# Altium PCB paw7.PcbDoc
Units mm, origin at the board's own origin, x right, y up, seen from the top; angles counter-clockwise.
Board outline 50 x 50 mm, 2 copper layers (Top Layer, Bottom Layer); 39 components, 67 nets, 199 pads, 66 vias.
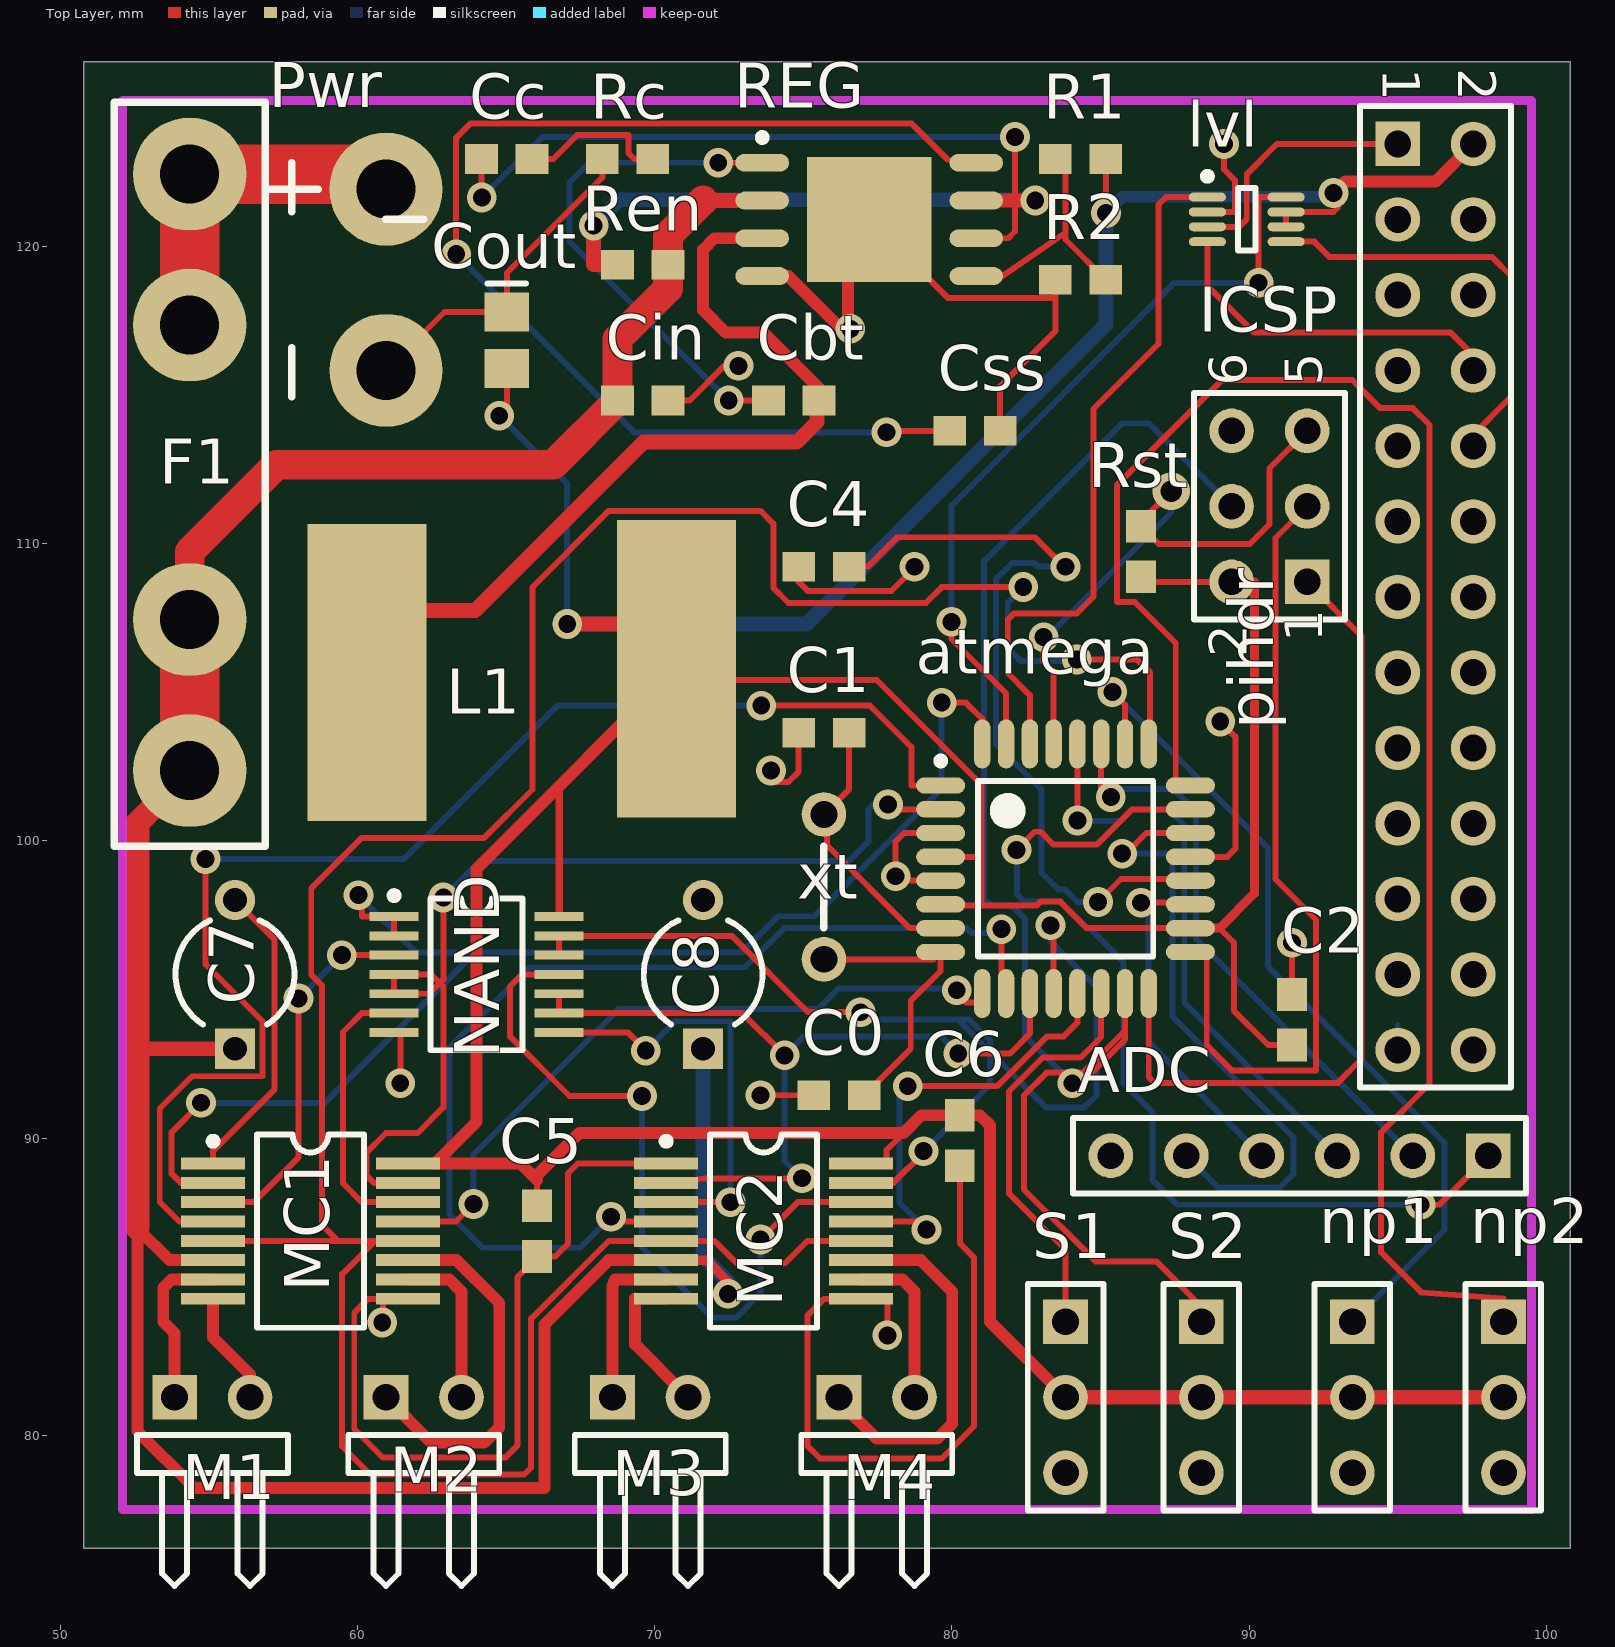
[diagram p0: Top Layer view]
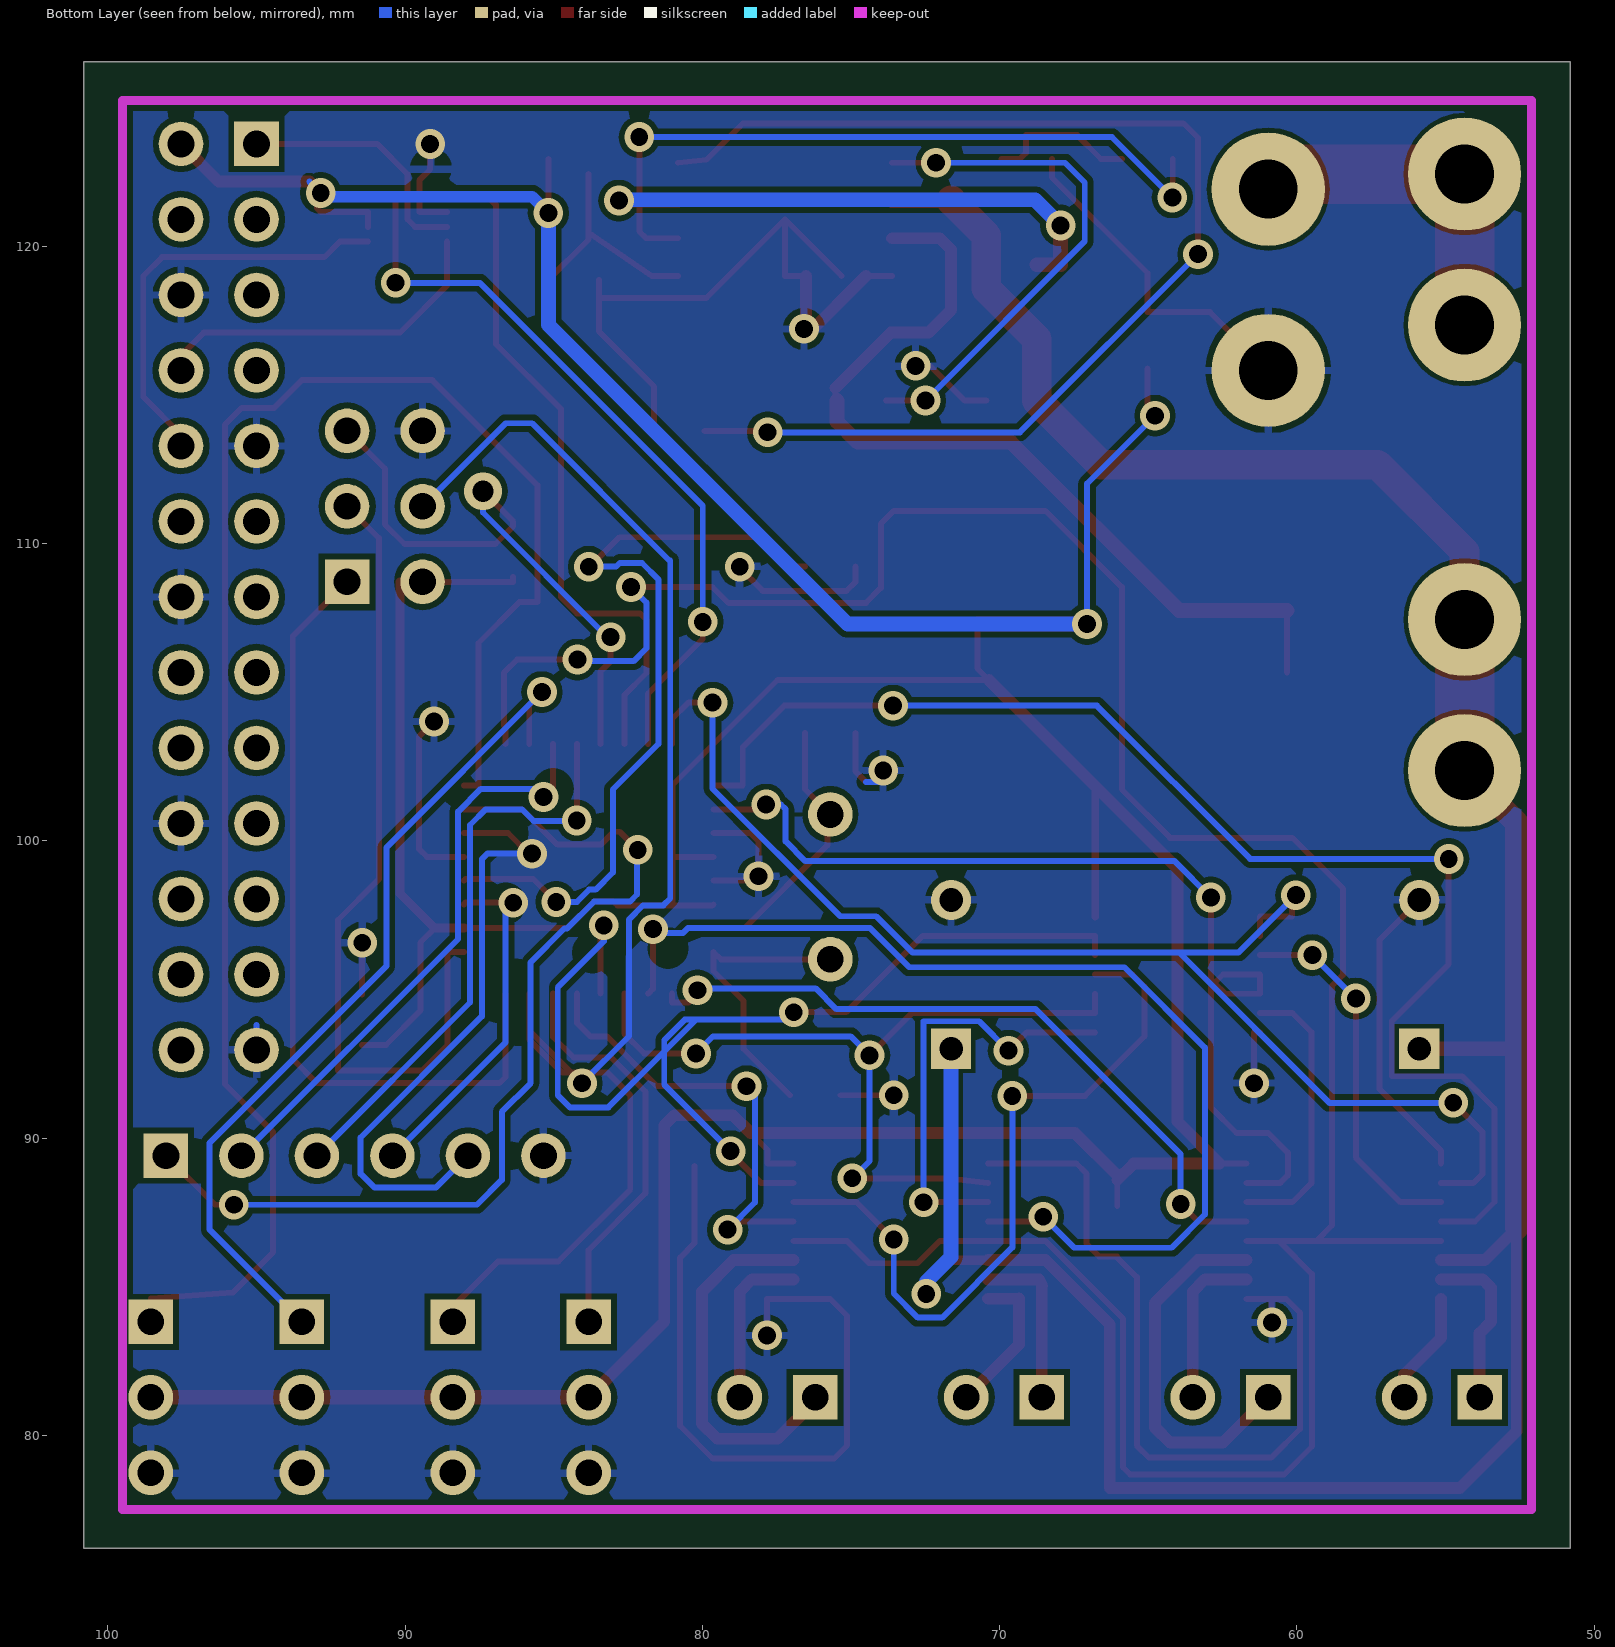
[diagram p1: Bottom Layer view, seen from below]

## Layer stack, top to bottom
Top Layer: signal copper 0.0356
Dielectric: dielectric 0.32, FR-4, Dk 4.8
Bottom Layer: signal copper 0.0356

## Board outline
50.8,76.2 100.8,76.2 100.8,126.2 50.8,126.2

## Design rules (kind name [scope] priority, off if disabled: settings)
Clearance Clearance_1 [InNetClass('12V')] p1: gap=0.15
Clearance [All] p2: gap=0.2
PolygonConnect [All] p1: connectstyle=Relief reliefconductorwidth=0.254 reliefentries=4 polygonreliefangle="90 Angle"
RoutingVias [All] p1: holewidth=0.6 width=1 viastyle="Through Hole" minholewidth=0.711 minwidth=1.27 maxholewidth=0.711 maxwidth=1.27
SMDNeckDown [All] p1: percent=80.000
SilkscreenOverComponentPads [All] p1: minsilkscreentomaskgap=0.254
SolderMaskExpansion [All] p1: expansion=0.102
TestPointUsage [All] p1: valid=0 allowmultiple=FALSE
Testpoint [All] p1: side=15 testpointundercomponent=TRUE minsize=1.016 maxsize=2.54 preferedsize=1.524 minholesize=0 maxholesize=1.016 preferedholesize=0.813 testpointgrid=0.025 style=1023 order=0123456789
Width Width_3 [InNet('NetREG_7')] p1: maxlimit=1 minlimit=0.254 preferedwidth=0.5
Width Width_2 [InNetClass('12V')] p2: maxlimit=1 minlimit=0.254 preferedwidth=0.5
Width Width_1 [InNetClass('Motor')] p3: maxlimit=0.4 minlimit=0.254 preferedwidth=0.4
Width [All] p4: maxlimit=0.2 minlimit=0.2 preferedwidth=0.2
23 further rules are at their usual default settings.

## Classes and differential pairs
net class Motor: NetM1_1 NetM1_2 NetM2_1 NetM2_2 NetM3_1 NetM3_2 NetM4_1 NetM4_2
net class 12V: NetF1_1 VBATT
component class U_PwrSupply: Cbt Cc Cin Cout Css L1 R1 R2 Rc REG Ren
component class U_MotorDriverToshiba: C5 C6 C7 C8 M1 M2 M3 M4 MC1 MC2 NAND
component class RpiPaw1_Sch: ADC atmega C0 C1 C2 C4 F1 ICSP lvl np1 np2 pihdr Pwr Rst S1 S2 xt

## Components (designator, comment, footprint, x,y, rotation, side; value= is the part's Value field where it differs from the comment)
ADC "A0A4A5A6A7" HDR1X6 98.044,89.408 r180 top
atmega "ATmega328P-AUR" TQFP32_N 83.82,99.06 r0 top
C0 "20pf 0603" J1-0603 76.2,91.44 r0 top
C1 "10pf 0603" J1-0603 75.692,103.632 r0 top
C2 "0.1uF 0603" J1-0603 91.44,93.98 r270 top
C4 "0.1uF 0603" J1-0603 75.692,109.22 r0 top
C5 "" J1-0603 66.04,86.868 r90 top
C6 "" J1-0603 80.264,89.916 r90 top
C7 "" CAPR5-4X5 55.88,95.504 r90 top
C8 "" CAPR5-4X5 71.628,95.504 r90 top
Cbt "" J1-0603 74.676,114.808 r180 top
Cc "" J1-0603 65.024,122.936 r0 top
Cin "" J1-0603 69.596,114.808 r180 top
Cout "" C0805 65.024,116.84 r270 top
Css "" J1-0603 80.772,113.792 r180 top
F1 "Fuse 20mm" FusePad1 54.356,122.428 r270 top
ICSP "Header 3X2" HDR2X3 91.948,108.712 r90 top
L1 "" Inductor_Paw 65.532,105.664 r0 top
lvl "TXB0102" TSSOP50P310X90-8N 89.916,120.904 r0 top
M1 "Header 2H" HDR1X2H 53.848,81.28 r0 top
M2 "Header 2H" HDR1X2H 60.96,81.28 r0 top
M3 "Header 2H" HDR1X2H 68.58,81.28 r0 top
M4 "Header 2H" HDR1X2H 76.2,81.28 r0 top
MC1 "TB6552FNG" SSOP16 58.42,86.868 r270 top
MC2 "TB6552FNG" SSOP16 73.66,86.868 r270 top
NAND "MM74HC132MTC" TSSOP14 64.008,95.504 r270 top
np1 "neoPix2" HDR1X3 93.472,83.82 r270 top
np2 "neoPix1" HDR1X3 98.552,83.82 r270 top
pihdr "Header 13X2" HDR2X13 94.996,123.444 r270 top
Pwr "Header 2" PwrPlug1 60.96,115.824 r90 top
R1 "" J1-0603 84.328,122.936 r0 top
R2 "" J1-0603 84.328,118.872 r0 top
Rc "" J1-0603 69.088,122.936 r0 top
REG "RT8250GSP" SOP-8-C_N 77.216,120.904 r0 top
Ren "" J1-0603 69.596,119.38 r0 top
Rst "10K 0603" J1-0603 86.36,109.728 r270 top
S1 "Servo1" HDR1X3 83.82,83.82 r270 top
S2 "Servo2" HDR1X3 88.392,83.82 r270 top
xt "16MHz" "Axial 0.2" 75.692,96.012 r90 top

## Footprints (in the part's own frame and the unit in brackets; to place one, negate y for a bottom-side part, rotate by r counter-clockwise, add the part's x,y. Pads: shape width x height; smd on the part's side, far side on the other; paste and mask are expansions set on the pad)
"Axial 0.2" [mm]
  round 1.5 hole 0.9: 1(0,0) 2(4.877,0)
  silkscreen extent 1.07,0 3.81,0
C0805 [mm] "Chip Capacitor; Body 2.0 x 1.2 mm (LxW typ)"
  rect 1.3x1.5 smd: 1(-0.95,0) 2(0.95,0)
  silkscreen extent -1.9,-0.65 -1.9,0.65
CAPR5-4X5 [mm] "Capacitor; 2 Leads"
  rect 1.35x1.35 hole 0.8: 1(-2.5,0)
  round 1.35 hole 0.8: 2(2.5,0)
  silkscreen extent -1.69,-2 1.82,2
FusePad1 [mil]
  round 150 hole 78: 1(0,0) 1(200,0) 2(590,0) 2(790,0)
  silkscreen extent -95,-100 890,100
HDR1X2H [mm] "Connector; Header; 2 Position; Right Angle"
  rect 1.5x1.5 hole 0.9: 1(0,0)
  round 1.5 hole 0.9: 2(2.54,0)
  silkscreen extent -1.27,-6.35 3.81,-1.27
HDR1X3 [mm] "Connector; Header; 3 Position"
  rect 1.5x1.5 hole 0.9: 1(0,0)
  round 1.5 hole 0.9: 2(2.54,0) 3(5.08,0)
  silkscreen extent -1.27,-1.27 6.35,1.27
HDR1X6 [mm] "Connector; Header; 6 Position"
  rect 1.5x1.5 hole 0.9: 1(0,0)
  round 1.5 hole 0.9: 2(2.54,0) 3(5.08,0) 4(7.62,0) 5(10.16,0) 6(12.7,0)
  silkscreen extent -1.27,-1.27 13.97,1.27
HDR2X3 [mm] "Connector; Header; 3x2 Position"
  rect 1.5x1.5 hole 0.9: 1(0,0)
  round 1.5 hole 0.9: 2(0,2.54) 3(2.54,0) 4(2.54,2.54) 5(5.08,0) 6(5.08,2.54)
  silkscreen extent -1.27,-1.27 6.35,3.81
HDR2X13 [mm] "Connector; Header; 13x2 Position"
  rect 1.5x1.5 hole 0.9: 1(0,0)
  round 1.5 hole 0.9: 2(0,2.54) 3(2.54,0) 4(2.54,2.54) 5(5.08,0) 6(5.08,2.54) 7(7.62,0) 8(7.62,2.54) 9(10.16,0) 10(10.16,2.54) 11(12.7,0) 12(12.7,2.54) 13(15.24,0) 14(15.24,2.54) 15(17.78,0) 16(17.78,2.54) 17(20.32,0) 18(20.32,2.54) 19(22.86,0) 20(22.86,2.54) 21(25.4,0) 22(25.4,2.54) 23(27.94,0) 24(27.94,2.54) 25(30.48,0) 26(30.48,2.54)
  silkscreen extent -1.27,-1.27 31.75,3.81
Inductor_Paw [mm]
  rect 4x10 smd: 1(-5.207,0) 2(5.207,0.127)
  body extent -4.77,-4.36 4.19,4.62, height 4
J1-0603 [mm] "Chip Resistor; Body 1.6 x 0.8 mm (LxW typ)"
  rect 1.1x1 smd: 1(-0.85,0) 2(0.85,0)
PwrPlug1 [mil]
  round 150 hole 78: 1(0,0) 2(240,0)
  silkscreen extent -35,-50 275,160
SOP-8-C_N [mm] "8-Pin Small Outline Package 1.27 mm Pitch, IPC Medium Density"
  oval 1.8x0.6 smd: 1(-3.6,1.905) 2(-3.6,0.635) 3(-3.6,-0.635) 4(-3.6,-1.905) 5(3.6,-1.905) 6(3.6,-0.635) 7(3.6,0.635) 8(3.6,1.905)
  rect 4.2x4.2 smd: 9(0,0)
  silkscreen extent -3.72,2.63 -3.47,2.88, body extent -2.11,-2.28 2.11,2.28, height 1.45
SSOP16 [mm] "SSOP; 16 Leads; Body Width 5.3 mm; Pitch 0.65 mm"
  rect 0.4x2.15 smd: 1(-2.275,-3.275) 2(-1.625,-3.275) 3(-0.975,-3.275) 4(-0.325,-3.275) 5(0.325,-3.275) 6(0.975,-3.275) 7(1.625,-3.275) 8(2.275,-3.275) 9(2.275,3.275) 10(1.625,3.275) 11(0.975,3.275) 12(0.325,3.275) 13(-0.325,3.275) 14(-0.975,3.275) 15(-1.625,3.275) 16(-2.275,3.275)
  silkscreen extent -3.25,-3.4 3.25,1.8
TQFP32_N [mm] "32-Pin Plastic Thin Quad Flat Pack (TFQP32), IPC Medium Density"
  oval 1.65x0.55 smd: 1(-4.2,2.8) 2(-4.2,2) 3(-4.2,1.2) 4(-4.2,0.4) 5(-4.2,-0.4) 6(-4.2,-1.2) 7(-4.2,-2) 8(-4.2,-2.8) 17(4.2,-2.8) 18(4.2,-2) 19(4.2,-1.2) 20(4.2,-0.4) 21(4.2,0.4) 22(4.2,1.2) 23(4.2,2) 24(4.2,2.8)
  oval 0.55x1.65 smd: 9(-2.8,-4.2) 10(-2,-4.2) 11(-1.2,-4.2) 12(-0.4,-4.2) 13(0.4,-4.2) 14(1.2,-4.2) 15(2,-4.2) 16(2.8,-4.2) 25(2.8,4.2) 26(2,4.2) 27(1.2,4.2) 28(0.4,4.2) 29(-0.4,4.2) 30(-1.2,4.2) 31(-2,4.2) 32(-2.8,4.2)
  silkscreen extent -4.32,-2.95 2.95,3.75, body extent -3.5,-3.5 3.5,3.5, height 1.2
TSSOP14 [mm] "Shrink Small Outline; 14 Leads; Body Width 4.4 mm; Pitch 0.65 mm"
  rect 0.3x1.65 smd: 1(-1.95,-2.775) 2(-1.3,-2.775) 3(-0.65,-2.775) 4(0,-2.775) 5(0.65,-2.775) 6(1.3,-2.775) 7(1.95,-2.775) 8(1.95,2.775) 9(1.3,2.775) 10(0.65,2.775) 11(0,2.775) 12(-0.65,2.775) 13(-1.3,2.775) 14(-1.95,2.775)
  silkscreen extent -2.77,-2.9 2.55,1.55
TSSOP50P310X90-8N [mm] "TSSOP, 8-Leads, Body 2.1x2.4mm (max), Pitch 0.50mm, IPC Medium Density"
  oval 1.25x0.3 smd: 1(-1.325,0.75) 2(-1.325,0.25) 3(-1.325,-0.25) 4(-1.325,-0.75) 5(1.325,-0.75) 6(1.325,-0.25) 7(1.325,0.25) 8(1.325,0.75)
  silkscreen extent -1.45,-1.05 0.3,1.57, body extent -1.2,-1.05 1.2,1.05, height 0.9

## Part data
ADC: library part "Header 6", "Header, 6-Pin"
atmega: "8-bit AVR Microcontroller, 32KB Flash, 1KB EEPROM, 2KB SRAM, 32-pin TQFP, Industrial Grade (-40°C to 85°C)"
C0 C1 C2 C4: library part Cap, "Capacitor"
C5 C6 Cbt Cc Cin Cout Css: library part CAP, "Capacitor"
C7 C8: library part Cap2, "Capacitor"
F1: library part "Fuse 1", "Fuse"
ICSP: "Header, 3-Pin, Dual row"
L1: library part Inductor, "Inductor"
lvl: "3.3V Level translator"
M1 M2 M3 M4: "Header, 2-Pin, Right Angle"
MC1 MC2: "2CH 1A PMIC"
NAND: "4Ch NAND Gate"
np1 np2 S1 S2: library part "Header 3", "Header, 3-Pin"
pihdr: "Header, 13-Pin, Dual row"
Pwr: "Header, 2-Pin"
R1 R2 Rc Ren: library part Res3, "Resistor"
REG: "3A 5V Buck Regulator"
Rst: library part Res2, "Resistor"
xt: library part XTAL, "Crystal Oscillator"

## Via types
v1: diameter 1, hole 0.6, Top Layer to Bottom Layer, 65 vias
v2: diameter 1.27, hole 0.711, Top Layer to Bottom Layer, 1 vias

## Nets (pads, with @x,y where several pads share a name; then routed paths per layer and width w, separated by ;. In a path a pad name is that pad's centre, name@x,y a point inside that pad or via, vN(x,y) a via of type N, cw(c..) or ccw(c..) an arc to the next point about the centre after c; other vN are vias at no path point)
+3.3V: lvl.3 pihdr.1 | length 8.5
  Top Layer w0.2: lvl.3 89.666,120.654 89.916,120.904 89.916,122.428 90.932,123.444 pihdr.1
+5V: atmega.4 atmega.6 atmega.18 C2.2 C5.2 C6.2 Cout.2 ICSP.2 L1.2 lvl.6 lvl.7 MC1.16 MC2.16 NAND.14 np1.2 np2.2 pihdr.2 R1.2 Rst.2 S1.2 S2.2 | length 182.3
  Top Layer w0.2: MC1.16 MC1.16@62.6,89.143 ; v1@64.77,114.351 65.024,114.605 Cout.2 ; C5.2 66.04,88.595 66.04,88.748 ; L1.2@70.739,107.29 L1.2 70.358,105.41 70.739,105.41 77.47,105.41 81.001,101.879 81.001,99.46 ; MC2.16 77.8,89.143 77.8,89.598 78.373,90.17 ; atmega.6 79.652,97.828 82.854,97.828 82.981,97.955 83.643,97.955 84.538,97.06 atmega.18 ; atmega.4 81.001,99.46 ; 81.001,97.885 81.001,99.46 ; v1(85.178,121.119) R1.2 ; Rst.2 86.36,108.712 90.17,108.712 ; 89.002,97.06 89.484,96.577 89.484,94.285 90.639,93.13 C2.2 ; lvl.6 lvl.7 ; 92.198,121.154 lvl.7 ; v1@92.964,121.793 92.964,121.285 92.833,121.154 lvl.7
  Top Layer w0.254: NAND.14 66.783,101.835
  Top Layer w0.3: atmega.18 89.002,97.06 90.17,98.228 90.17,108.712 ; v1(92.837,121.793) 93.218,122.174
  Top Layer w0.4: 66.04,88.595 65.492,89.143 62.6,89.143 64.008,90.551 64.008,99.06 66.783,101.835 68.631,103.683 L1.2@70.358,105.41 ; 66.04,88.748 67.462,90.17 78.373,90.17 78.969,90.766 C6.2 80.938,90.766 81.28,90.424 81.28,90.17 81.28,83.82 S1.2 ; 93.218,122.174 96.266,122.174 pihdr.2
  Top Layer w0.5: v1(67.056,107.29) L1.2@70.739,107.29 ; S1.2 S2.2 np1.2 np2.2
  Bottom Layer w0.2: v1(64.77,114.3) 67.056,112.014 v1(67.056,107.29) ; v1@92.837,121.92 v1(92.837,121.793) 93.218,122.174
  Bottom Layer w0.4: v1(85.178,121.119) 85.725,121.666 v1@92.71,121.666
  Bottom Layer w0.5: v1(67.056,107.29) 75.108,107.29 85.178,117.36 v1(85.178,121.119)
GND: ADC.6 atmega.3 atmega.5 atmega.21 C0.1 C1.1 C2.1 C4.1 C5.1 C6.1 C7.2 C8.2 Cin.1 Cout.1 Css.1 ICSP.6 lvl.2 MC1.1 MC1.9 MC2.1 MC2.9 NAND.7 np1.3 np2.3 pihdr.6 pihdr.9 pihdr.14 pihdr.20 pihdr.25 Pwr.1 R2.1 Rc.1 REG.4 REG.9 S1.3 S2.3 | length 127.3
  Top Layer w0.2: MC1.1 55.143,89.143 55.143,89.573 57.214,91.643 57.214,96.67 C7.2 ; v1(60.833,83.795) 60.858,83.82 MC1.9@60.858,84.593 ; Pwr.1 62.926,117.79 Cout.1 65.024,119.101 68.238,122.315 Rc.1 ; NAND.7 61.443,93.554 v1(61.443,91.846) ; MC1.9 MC1.9@60.858,84.593 ; MC2.1 67.412,89.143 67.081,88.813 67.081,86.45 66.65,86.018 C5.1 66.04,85.979 65.38,85.319 65.38,79.654 64.973,79.248 60.858,79.248 59.893,80.213 59.893,84.125 60.361,84.593 MC1.9@60.858,84.593 ; Cin.1 71.171,114.808 72.339,115.976 v1(72.822,115.976) ; v1(73.558,91.44) C0.1 ; REG.4 REG.4@74.498,118.999 ; v1(73.914,102.362) 73.914,102.108 74.041,101.981 74.498,101.981 74.842,102.325 C1.1 ; C4.1 74.842,108.712 75.147,108.407 77.967,108.407 v1@78.78,109.22 ; REG.9@75.311,118.999 REG.9 ; REG.9@76.505,118.999 77.216,118.999 REG.9 ; v1(77.826,83.363) 77.826,84.593 MC2.9 75.703,84.593 75.133,84.023 75.133,79.654 75.565,79.223 79.654,79.223 80.747,80.315 80.747,85.979 80.264,86.462 C6.1 ; atmega.5 78.607,98.66 78.105,99.162 78.105,99.974 78.391,100.26 atmega.3 ; Css.1 81.622,115.289 83.478,117.145 83.478,118.262 ; R2.1 83.478,118.262 ; atmega.21 89.262,99.46 89.535,99.733 89.535,103.505 v1(89.027,104.013) ; lvl.2 89.516,121.154 89.516,122.218 89.154,122.58 v1(89.154,123.444) ; C2.1 v1(91.44,96.571) ; REG.9 79.858,118.262 83.478,118.262
  Top Layer w0.4: REG.4@74.498,118.999 76.505,116.992 REG.9@76.505,118.999
  Bottom Layer w0.2: v1(73.914,102.362) 73.914,102.108 74.041,101.981 74.498,101.981 ; v1@89.129,123.419 v1(89.154,123.444) ; pihdr.25 94.996,93.802
  other v1: 78.105,98.806 78.74,109.22 76.581,117.221
GPIO0(SDA): pihdr.3
GPIO1(SCL): pihdr.5
GPIO4: pihdr.7
GPIO7(CE1): pihdr.26
GPIO8(CE0): pihdr.24
GPIO9(MISO): pihdr.21
GPIO10(MOSI): pihdr.19
GPIO17: pihdr.11
GPIO18: pihdr.12
GPIO21: pihdr.13
GPIO22: pihdr.15
GPIO23: pihdr.16
GPIO24: pihdr.18
GPIO25: pihdr.22
GPIO(SCLK): pihdr.23
MISO: atmega.16 ICSP.1 | length 27.2
  Top Layer w0.2: atmega.16 86.62,92.05 86.823,91.846 92.964,91.846 93.777,92.659 93.777,106.883 ICSP.1
MOSI: atmega.15 ICSP.4 S2.1 | length 50.1
  Top Layer w0.2: v1(84.049,91.846) 84.404,92.202 ; atmega.15 85.82,93.618 ; S2.1 88.392,84.328 86.868,85.852 84.836,85.852 82.423,88.265 82.423,91.44 83.185,92.202 84.404,92.202 ; 84.404,92.202 84.709,92.202 85.82,93.313 85.82,93.618 ; 84.404,92.202 85.82,93.618
  Bottom Layer w0.2: 81.077,109.423 81.077,98.061 81.31,97.828 81.992,97.828 82.461,97.359 82.461,93.434 v1(84.049,91.846) ; 81.102,109.423 85.725,114.046 86.614,114.046 ICSP.4
NetADC_1: ADC.1 atmega.23 | length 33.1
  Top Layer w0.2: v1(82.169,99.695) 82.779,100.305 82.982,100.305 83.414,99.873 84.875,99.873 86.062,101.06 atmega.23 ; v1(95.758,87.757) 96.393,87.757 ADC.1
  Bottom Layer w0.2: v1(82.169,99.695) 82.169,99.797 82.194,99.797 82.194,98.192 82.431,97.955 83.643,97.955 84.545,97.053 84.633,97.053 85.776,95.91 85.776,91.846 86.741,90.881 86.741,88.595 87.579,87.757 v1(95.758,87.757)
NetADC_2: ADC.2 atmega.27 | length 19.9
  Top Layer w0.2: atmega.27 85.02,101.746 85.293,101.473 v1(85.344,101.473)
  Bottom Layer w0.2: v1(85.344,101.473) 85.344,101.575 85.516,101.746 87.448,101.746 88.214,100.98 88.214,96.698 ADC.2
NetADC_3: ADC.3 atmega.28 | length 19.8
  Top Layer w0.2: v1(84.22,100.686) atmega.28
  Bottom Layer w0.2: v1(84.22,100.686) 84.233,100.673 85.675,100.673 86.062,101.06 87.288,101.06 87.814,100.534 87.814,94.558 ADC.3
NetADC_4: ADC.4 atmega.19 | length 12
  Top Layer w0.2: v1(86.36,97.917) 87.963,97.917 atmega.19
  Bottom Layer w0.2: v1(86.36,97.917) 86.589,97.917 86.614,97.892 86.614,93.218 ADC.4
NetADC_5: ADC.5 atmega.22 | length 20.9
  Top Layer w0.2: v1(85.725,99.568) 85.846,99.568 86.538,100.26 atmega.22
  Bottom Layer w0.2: v1(85.725,99.568) 87.23,99.568 87.414,99.384 87.414,94.094 91.491,90.018 91.491,88.798 91.034,88.341 88.951,88.341 ADC.5
Netatmega_1: atmega.1 MC1.4 | length 46
  Top Layer w0.2: v1(54.889,99.39) 54.889,95.845 56.805,93.929 56.805,92.079 54.436,92.079 53.35,90.993 53.35,87.849 54.006,87.193 MC1.4 ; v1(73.584,104.546) 77.241,104.546 78.638,103.149 78.638,101.86 atmega.1
  Bottom Layer w0.2: v1(54.889,99.39) 61.57,99.39 66.726,104.546 v1(73.584,104.546)
Netatmega_2: atmega.2 MC1.15 NAND.4 NAND.5 | length 35.4
  Top Layer w0.2: MC1.15 60.554,88.493 60.3,88.747 60.3,89.51 60.96,90.17 62.027,90.17 62.89,91.034 62.89,95.098 62.771,95.217 ; v1(62.89,98.095) 62.89,95.337 62.771,95.217 ; v1(77.851,101.219) 77.84,101.208 77.84,101.201 77.981,101.06 atmega.2 ; 62.771,95.217 62.484,95.504 NAND.4 NAND.5 62.408,94.854 62.771,95.217
  Bottom Layer w0.2: v1(62.89,98.095) 64.11,99.314 76.53,99.314 77.197,99.981 77.197,101.067 77.35,101.219 v1(77.851,101.219)
Netatmega_7: atmega.7 C1.2 xt.2 | length 9.2
  Top Layer w0.2: xt.2 xt.2@75.794,100.99 ; C1.2 76.542,101.739 xt.2@75.794,100.99 ; atmega.7 78.581,97.06 75.794,99.847 75.794,100.889 xt.2@75.794,100.99
Netatmega_8: atmega.8 C0.2 xt.1 | length 9.9
  Top Layer w0.2: xt.1 79.372,96.012 atmega.8 79.62,95.622 78.613,94.615 78.613,93.003 C0.2
Netatmega_9: atmega.9 MC1.13 | length 24.1
  Top Layer w0.2: MC1.13 63.317,87.193 v1(63.906,87.782) ; v1(80.162,94.971) 80.162,94.869 80.467,94.564 81.02,94.564 atmega.9
  Bottom Layer w0.2: v1(63.906,87.782) 63.906,89.459 68.783,94.336 75.489,94.336 76.187,95.034 80.099,95.034 v1(80.162,94.971)
Netatmega_10: atmega.10 MC2.4 | length 36.5
  Top Layer w0.2: v1(68.529,87.351) 68.687,87.193 MC2.4 ; v1(81.661,97.028) 81.661,95.019 atmega.10
  Bottom Layer w0.2: v1(68.529,87.351) 67.488,86.309 64.211,86.309 63.094,87.427 63.094,93.04 65.799,95.745 73.038,95.745 74.355,97.062 80.484,97.062 80.645,96.901 81.534,96.901 v1(81.661,97.028)
Netatmega_11: atmega.11 MC2.2 NAND.9 NAND.10 | length 28.2
  Top Layer w0.2: NAND.10 NAND.9 72.949,94.204 v1(74.371,92.782) ; MC2.2 71.679,88.646 v1(74.955,88.646) ; v1(80.213,92.847) 81.957,92.847 82.62,93.51 atmega.11
  Bottom Layer w0.2: v1(74.955,88.646) 74.371,89.23 v1(74.371,92.782) 75.011,93.421 79.639,93.421 v1(80.213,92.847)
Netatmega_12: atmega.12 MC2.15 NAND.12 NAND.13 | length 38.6
  Top Layer w0.2: NAND.12 NAND.13 72.589,96.804 75.159,94.234 v1(76.923,94.234) ; MC2.15 78.029,88.493 79.045,89.509 v1(79.045,89.56) ; v1(83.312,97.155) 83.42,97.047 atmega.12
  Bottom Layer w0.2: v1(76.923,94.234) 77.173,93.984 80.209,93.984 ; v1(79.045,89.56) 81.28,91.796 81.28,92.913 ; v1(83.312,97.155) 83.312,96.622 84.861,95.072 84.861,91.44 84.455,91.034 83.16,91.034 81.28,92.913 ; 80.209,93.984 81.28,92.913 ; 80.209,93.984 80.59,93.984 81.28,93.294 81.28,92.913
Netatmega_13: atmega.13 MC2.13 | length 15.2
  Top Layer w0.2: MC2.13 78.872,87.193 v1(79.146,86.919) ; v1(78.511,91.745) 81.527,91.745 83.203,93.421 83.763,93.421 84.22,93.878 atmega.13
  Bottom Layer w0.2: v1(78.511,91.745) 78.232,91.465 78.232,87.833 v1(79.146,86.919)
Netatmega_14: atmega.14 S1.1 | length 13.9
  Top Layer w0.2: S1.1 83.82,86.233 81.915,88.138 81.915,91.567 83.058,92.71 84.328,92.71 85.02,93.402 atmega.14
Netatmega_20: atmega.20 C4.2 | length 26.9
  Top Layer w0.2: C4.2 77.165,109.22 78.156,110.211 82.789,110.211 v1@83.78,109.22 ; v1(84.912,97.942) 85.687,98.717 87.963,98.717 atmega.20
  Bottom Layer w0.2: v1@83.78,109.22 82.9,109.22 82.773,109.347 82.029,109.347 81.477,108.795 81.477,103.257 83.007,101.727 83.007,98.933 83.585,98.355 83.809,98.355 84.222,97.942 v1(84.912,97.942)
  other v1: 83.82,109.22
Netatmega_24: atmega.24 np2.1 | length 58.4
  Top Layer w0.2: atmega.24 87.528,101.86 87.528,106.655 86.157,108.026 85.547,108.026 85.547,111.963 89.078,115.494 93.472,115.494 94.412,114.554 95.504,114.554 96.063,113.995 96.063,91.821 94.437,90.195 94.437,86.157 95.783,84.811 98.552,84.607 np2.1
Netatmega_25: atmega.25 MC1.5 MC1.12 MC2.5 MC2.12 | length 96.6
  Top Layer w0.2: MC1.5 59.334,86.543 ; MC1.12 60.61,86.543 ; MC2.12 75.138,86.543 74.384,85.789 72.758,85.789 72.004,86.543 MC2.5 68.464,86.543 65.844,83.923 65.844,78.918 65.608,78.682 60.427,78.682 59.487,79.622 59.487,85.42 60.61,86.543 ; v1(82.398,108.534) 79.654,108.534 79.121,108.001 74.498,108.001 73.99,108.509 73.99,110.668 73.558,111.1 68.453,111.1 65.888,108.534 65.888,101.727 64.262,100.101 60.147,100.101 58.445,98.4 58.445,95.491 58.814,95.123 58.814,87.064 59.334,86.543 ; v1(84.201,106.096) 86.233,106.096 86.665,105.664 86.665,103.88 86.62,103.835 atmega.25 ; 59.334,86.543 60.61,86.543
  Bottom Layer w0.2: v1(82.398,108.534) 81.877,108.014 81.877,106.477 82.309,106.045 84.15,106.045 v1(84.201,106.096)
Netatmega_26: atmega.26 np1.1 | length 29
  Top Layer w0.2: v1(85.395,105.004) 85.82,104.578 atmega.26
  Bottom Layer w0.2: v1(85.395,105.004) 90.627,99.771 90.627,95.783 96.571,89.84 96.571,86.919 np1.1
Netatmega_30: atmega.30 lvl.1 | length 23.5
  Top Layer w0.2: atmega.30 82.62,104.902 81.877,105.645 81.877,107.436 82.093,107.651 84.207,107.651 84.76,108.204 84.76,114.529 86.944,116.713 86.944,121.4 87.198,121.654 lvl.1
Netatmega_31: atmega.31 lvl.8 | length 26
  Top Layer w0.2: v1(79.985,107.366) 79.985,106.788 81.82,104.953 atmega.31 ; v1(90.316,118.77) 90.316,121.654 lvl.8
  Bottom Layer w0.2: v1(79.985,107.366) 79.985,111.272 87.483,118.77 v1(90.316,118.77)
Netatmega_32: atmega.32 MC1.2 NAND.1 NAND.2 | length 46.2
  Top Layer w0.2: v1(54.737,91.186) 53.75,90.199 53.75,88.794 54.051,88.493 MC1.2 ; v1(60.032,98.171) 60.155,98.048 60.155,97.454 NAND.1 NAND.2 ; v1(79.654,104.648) 80.467,104.648 81.02,104.095 atmega.32
  Bottom Layer w0.2: v1(54.737,91.186) 58.903,91.186 63.963,96.247 ; v1(60.032,98.171) 61.956,96.247 63.963,96.247 ; v1(79.654,104.648) 79.654,101.752 75.364,97.462 74.149,97.462 72.934,96.247 63.963,96.247
NetCbt_1: Cbt.1 L1.1 REG.3 | length 30.2
  Top Layer w0.2: L1.1 L1.1@60.325,107.747 ; Cbt.1@75.463,114.808 Cbt.1 Cbt.1@75.526,115.228
  Top Layer w0.4: REG.3 72.009,120.269 71.628,119.888 71.628,117.856 72.39,117.094 73.66,117.094 Cbt.1@75.526,115.228
  Top Layer w0.5: L1.1@60.325,107.747 63.957,107.747 69.621,113.411 74.778,113.411 75.463,114.097 Cbt.1@75.463,114.808
NetCbt_2: Cbt.2 REG.1 | length 17.6
  Top Layer w0.2: v1(72.136,122.809) REG.1 ; v1(72.492,114.808) Cbt.2
  Bottom Layer w0.2: v1(72.136,122.809) 67.796,122.809 67.133,122.146 67.133,120.166 v1(72.492,114.808)
NetCc_1: Cc.1 REG.6 | length 24.6
  Top Layer w0.2: Cc.1 64.174,121.652 v1(64.186,121.641) ; REG.6 81.89,120.269 82.118,120.498 v1(82.118,123.673)
  Bottom Layer w0.2: v1(64.186,121.641) 66.218,123.673 v1(82.118,123.673)
NetCc_2: Cc.2 Rc.2 | length 5.1
  Top Layer w0.2: Cc.2 66.586,122.936 67.386,123.736 69.113,123.736 69.113,123.139 69.317,122.936 Rc.2
NetCss_2: Css.2 REG.8 | length 41.2
  Top Layer w0.2: v1(63.322,119.736) 63.322,123.647 63.811,124.136 78.632,124.136 79.858,122.911 REG.8 ; v1(77.8,113.741) 77.851,113.792 Css.2
  Bottom Layer w0.2: v1(63.322,119.736) 69.317,113.741 v1(77.8,113.741)
NetF1_1: F1.1 Pwr.2 | length 11.9
  Top Layer w0.4: Pwr.2@60.452,122.428 Pwr.2
  Top Layer w2: F1.1@54.356,117.348 54.356,122.428 Pwr.2@60.452,122.428
NetM1_1: M1.1 MC1.7 | length 5.6
  Top Layer w0.4: M1.1 53.848,83.439 53.467,83.82 53.467,84.963 53.747,85.243 MC1.7
NetM1_2: M1.2 MC1.8 | length 3.8
  Top Layer w0.4: MC1.8 55.145,83.285 56.388,82.042 M1.2
NetM2_1: M2.1 MC1.11 | length 12.5
  Top Layer w0.4: M2.1 62.484,79.756 64.262,79.756 64.77,80.264 64.77,84.455 63.332,85.893 MC1.11
NetM2_2: M2.2 MC1.10 | length 5.5
  Top Layer w0.4: MC1.10 63.093,85.243 63.5,84.836 M2.2
NetM3_1: M3.1 MC2.7 | length 5.7
  Top Layer w0.4: M3.1 68.58,85.015 68.573,85.022 68.665,85.243 MC2.7
NetM3_2: M3.2 MC2.8 | length 5.2
  Top Layer w0.4: MC2.8 69.353,84.593 69.342,84.604 69.342,84.593 69.342,83.058 70.982,81.418 71.12,81.407 M3.2
NetM4_1: M4.1 MC2.11 | length 12.6
  Top Layer w0.4: M4.1 76.2,81.153 77.47,79.883 79.502,79.883 80.01,80.391 80.01,84.836 78.953,85.893 MC2.11
NetM4_2: M4.2 MC2.10 | length 5.5
  Top Layer w0.4: MC2.10 78.333,85.243 78.74,84.836 M4.2
NetMC1_3: MC1.3 NAND.3 | length 12.7
  Top Layer w0.2: MC1.3 56.515,87.843 58.014,89.342 v1(58.014,94.691) ; v1(59.476,96.154) NAND.3
  Bottom Layer w0.2: v1(58.014,94.691) v1(59.476,96.154)
NetMC1_14: MC1.14 NAND.6 | length 9.5
  Top Layer w0.2: NAND.6 60.147,94.204 59.512,93.569 59.512,88.478 60.147,87.843 MC1.14
NetMC2_3: MC2.3 NAND.8 | length 14.7
  Top Layer w0.2: NAND.8 69.088,93.554 v1(69.701,92.941) ; MC2.3 v1(72.553,87.843)
  Bottom Layer w0.2: v1(69.701,92.941) 70.688,93.929 72.553,93.929 v1(72.553,87.843)
NetMC2_14: MC2.14 NAND.11 | length 24.9
  Top Layer w0.2: NAND.11 65.532,95.504 65.126,95.098 65.126,93.421 67.132,91.415 v1(69.571,91.415) ; v1(73.558,86.589) 74.813,87.843 MC2.14
  Bottom Layer w0.2: v1(69.571,91.415) 69.571,86.322 71.933,83.96 72.746,83.96 73.558,84.773 v1(73.558,86.589)
NetR1_1: R1.1 R2.2 REG.5 | length 7.5
  Top Layer w0.2: REG.5 81.7,118.999 83.732,120.396 ; 83.82,122.428 83.82,120.23 R2.2
NetREG_7: REG.7 Ren.1 | length 18.7
  Top Layer w0.48: REG.7 82.474,121.539 v1@82.474,121.564
  Top Layer w0.5: v1(67.945,120.701) 67.945,119.38 Ren.1
  Bottom Layer w0.5: v1(67.945,120.701) 68.809,121.564 v1@82.474,121.564
  other v1: 82.804,121.539
RESET: atmega.29 ICSP.5 Rst.1 | length 20.7
  Top Layer w0.2: v1(83.083,106.851) 83.083,106.039 83.42,105.702 atmega.29 ; v2(87.376,111.76) 86.36,110.744 Rst.1 86.956,109.982 90.018,109.982 90.678,110.642 90.678,112.522 ICSP.5
  Bottom Layer w0.2: v1(83.083,106.851) v1@83.186,106.851 ; v1@83.331,106.851 v1@83.186,106.851 ; v2(87.376,111.76) 87.376,111.042 v1@83.186,106.851
RXD: lvl.5 pihdr.10 | length 14.3
  Top Layer w0.2: lvl.5 92.19,120.154 92.71,119.634 98.171,119.634 98.806,118.999 98.806,114.935 97.536,113.665 pihdr.10
SCK: atmega.17 ICSP.3 | length 27.7
  Top Layer w0.2: atmega.17 88.57,96.26 88.57,93.116 89.408,92.278 92.253,92.278 92.253,97.338 90.881,98.709 90.881,110.185 ICSP.3
TXD: lvl.4 pihdr.8 | length 12.6
  Top Layer w0.16: pihdr.8 pihdr.8@98.044,115.824
  Top Layer w0.2: lvl.4 88.591,118.673 90.17,117.094 96.774,117.094 97.79,116.078 pihdr.8@98.044,115.824
VBATT: C7.1 C8.1 Cin.2 F1.2 MC1.6 MC2.6 REG.2 Ren.2 | length 99.3
  Top Layer w0.32: MC2.6 71.739,85.893 72.466,85.166 v1(72.466,84.76)
  Top Layer w0.4: MC1.6 53.68,85.893 52.6,86.973 52.6,80.137 54.505,78.232 66.294,78.232 66.294,83.736 68.451,85.893 MC2.6
  Top Layer w0.5: 52.64,93.004 C7.1 ; 71.628,121.539 REG.2
  Top Layer w0.8: 52.6,86.973 52.6,100.606 F1.2@54.356,102.362
  Top Layer w1: F1.2@54.356,107.442 54.356,109.728 57.277,112.649 66.587,112.649 Cin.2 68.746,116.879 70.446,118.579 Ren.2 70.446,120.357 71.628,121.539
  Top Layer w2: F1.2@54.356,102.362 F1.2@54.356,107.442
  Bottom Layer w0.32: v1(72.466,84.76) v1@72.466,85.166
  Bottom Layer w0.5: C8.1 71.628,86.004 v1@72.466,85.166
pads on no net: pihdr.4 pihdr.17

## Polygon pours and split planes (outlines as drawn)
GND on Bottom Layer "gndpoly" (solid, pour order 1000): 51.816,124.841 52.07,124.587 52.07,77.724 99.441,77.724 99.695,77.47 99.568,77.597 99.568,124.841

## Keep-outs
Keep-Out Layer:
  lines w0.3: 52.1,77.5 52.1,124.9 99.5,124.9 99.5,77.5 52.1,77.5

## Silkscreen, mask and mechanical layers (free items; w line width, h text height)
Drill Drawing:
  text ".LEGEND" at 105.88,81.28 h1.52
  text "Drill Drawing." at 105.88,78.74 h1.52

## Dimensions
52.1,77.5 to 52.1,124.9 on Mechanical 1
52.1,77.5 to 99.5,77.5 on Mechanical 1

## Text inside footprints (layer, text, board x,y; h text height)
ICSP: Top Overlay "6" at 89.916,115.316 h1.27 r90; Top Overlay "5" at 92.456,115.316 h1.27 r90; Top Overlay "2" at 89.916,106.172 h1.27 r90; Top Overlay "1" at 92.456,106.68 h1.27 r90
pihdr: Top Overlay "2" at 97.028,125.984 h1.27 r270; Top Overlay "1" at 94.488,125.984 h1.27 r270